# Altium PCB BQ25895_BMS_Module.PcbDoc
Units mm, origin at the board's own origin, x right, y up, seen from the top; angles counter-clockwise.
Board outline 50 x 50 mm, 2 copper layers (Top Layer, Bottom Layer), stack 1.671 mm thick; 53 components, 25 nets, 140 pads, 19 vias.
Unrouted connection lines stored in the file: 90.
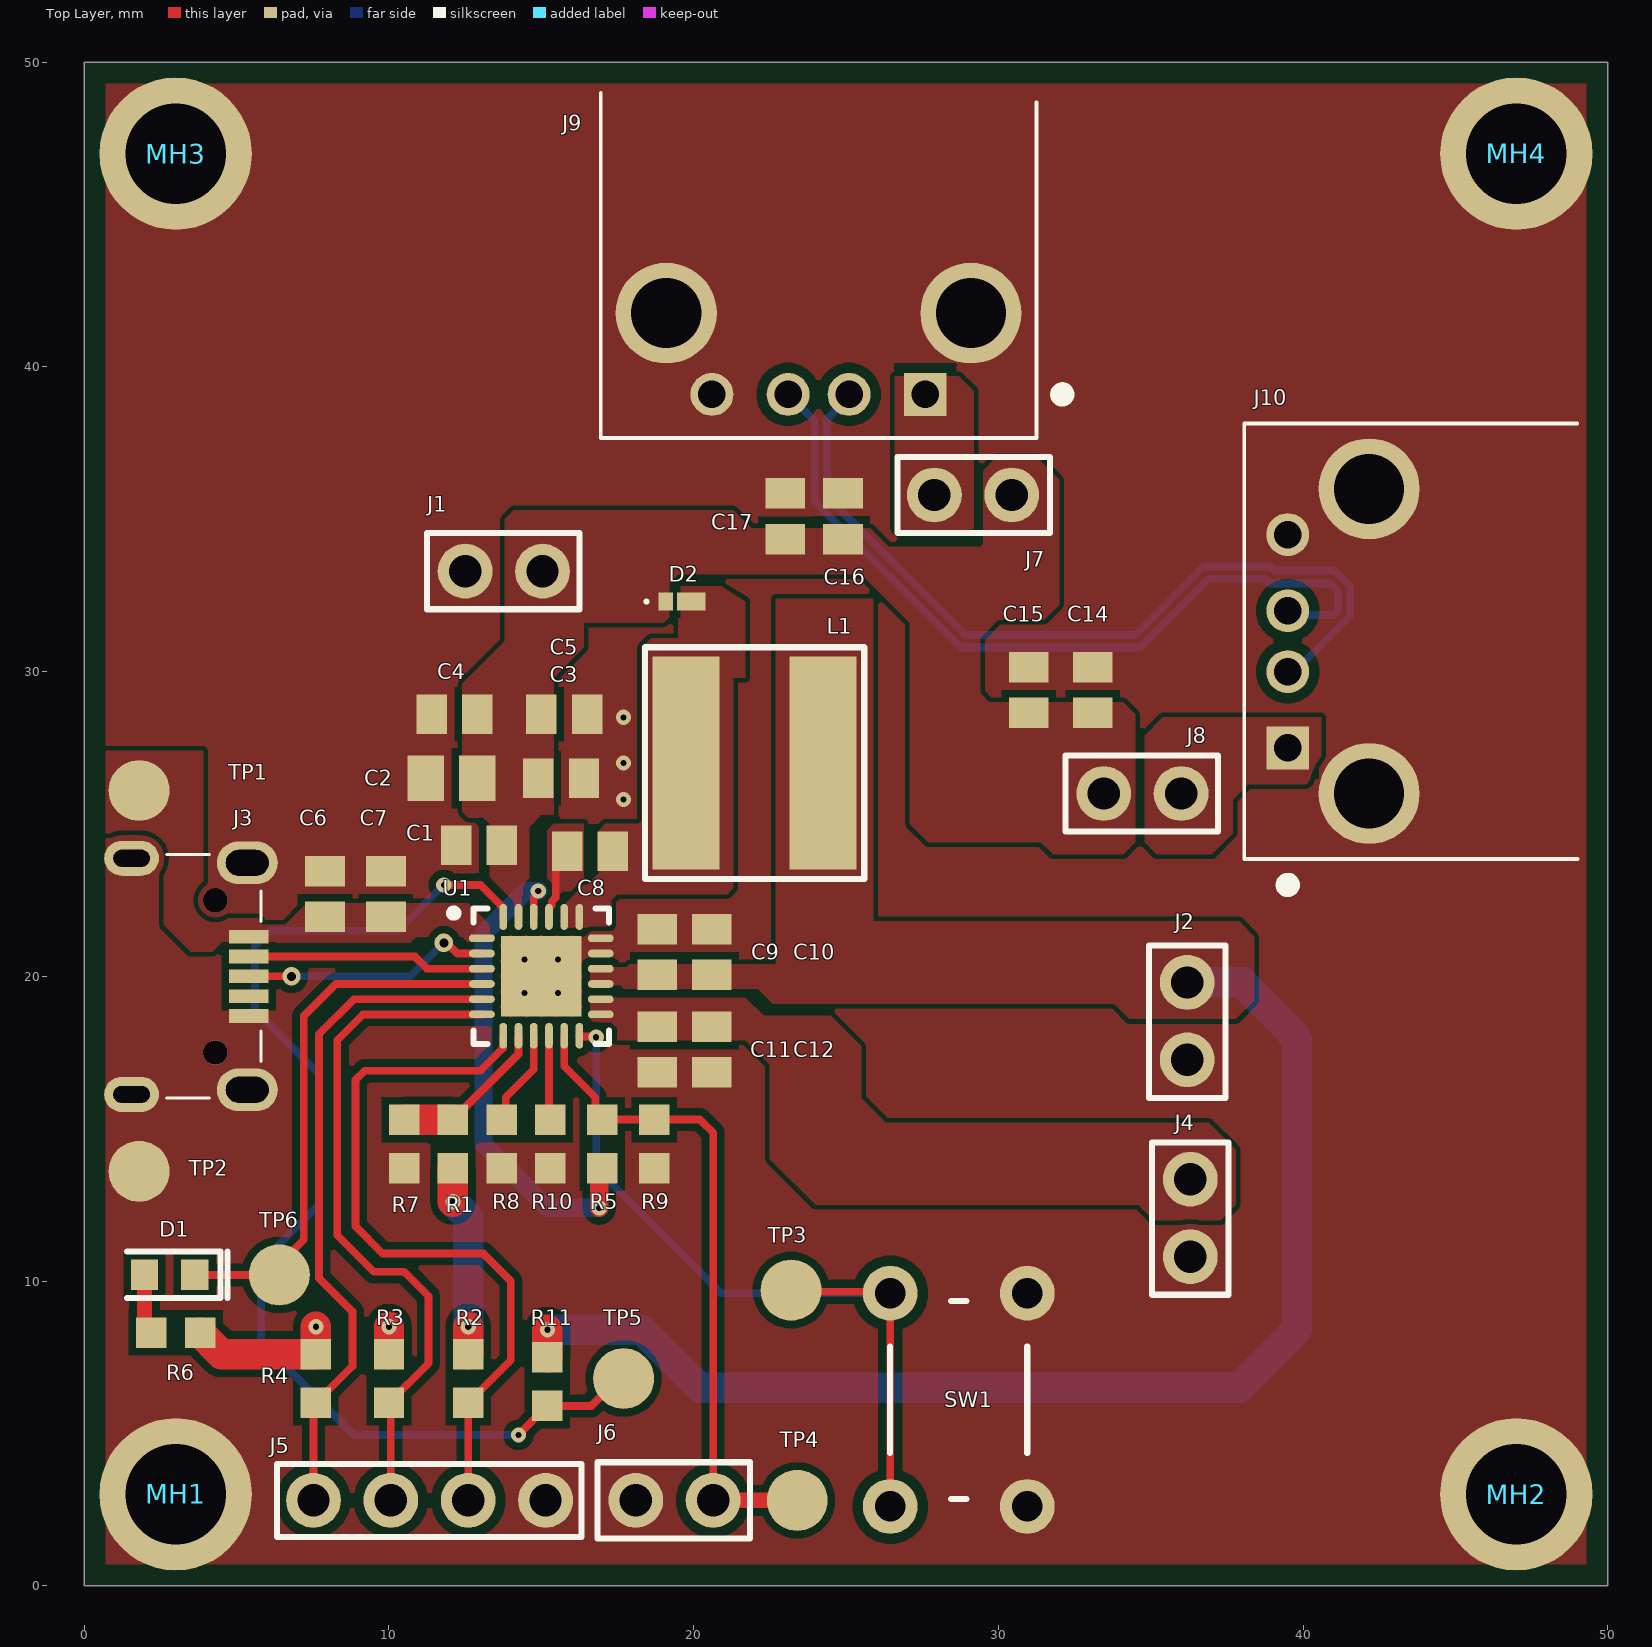
[diagram p0: Top Layer view]
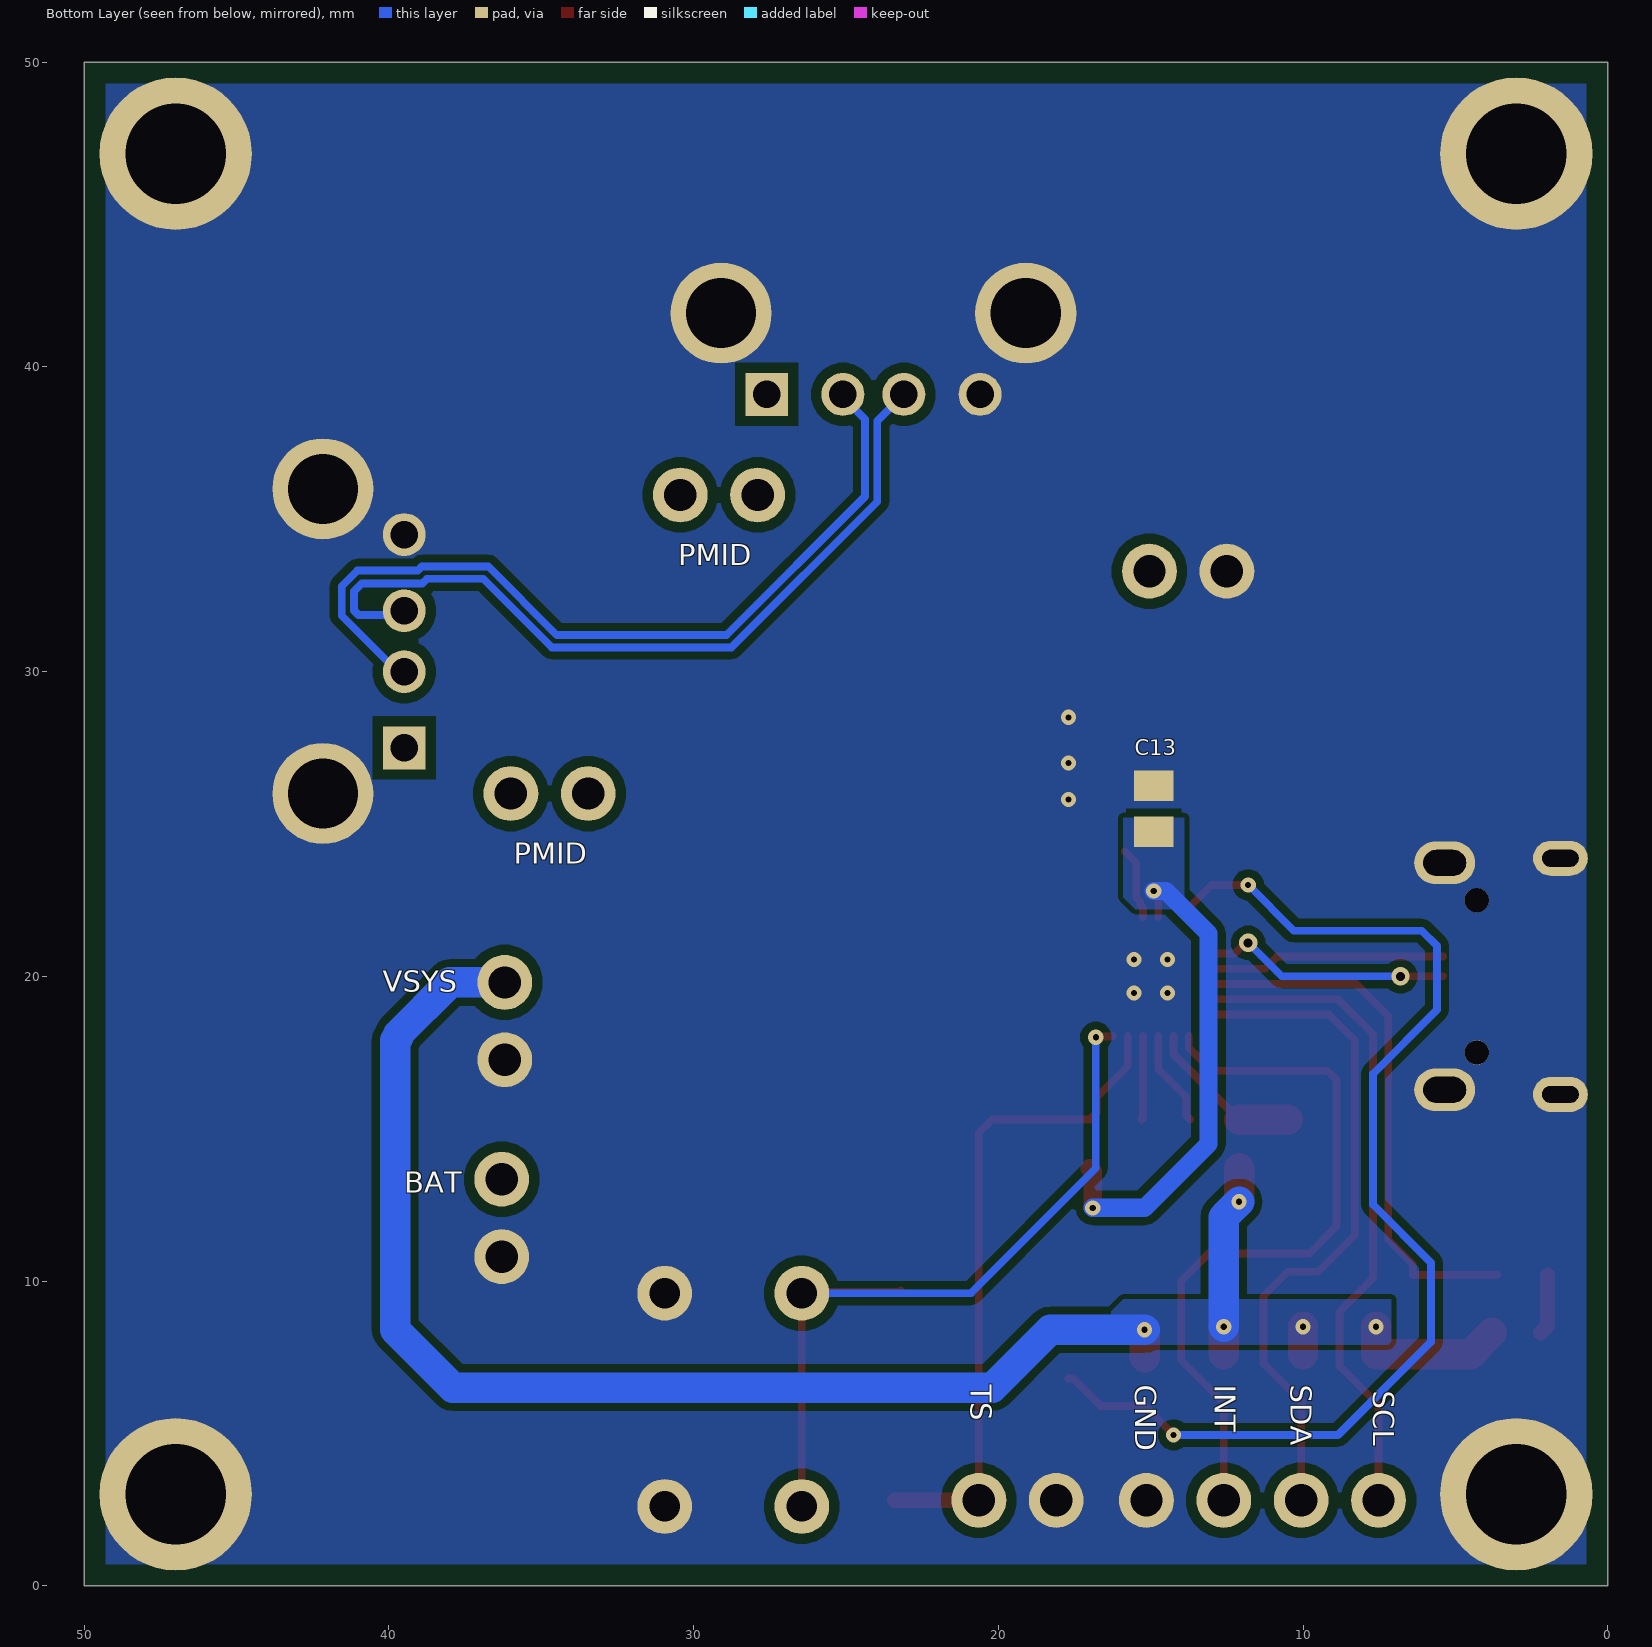
[diagram p1: Bottom Layer view, seen from below]
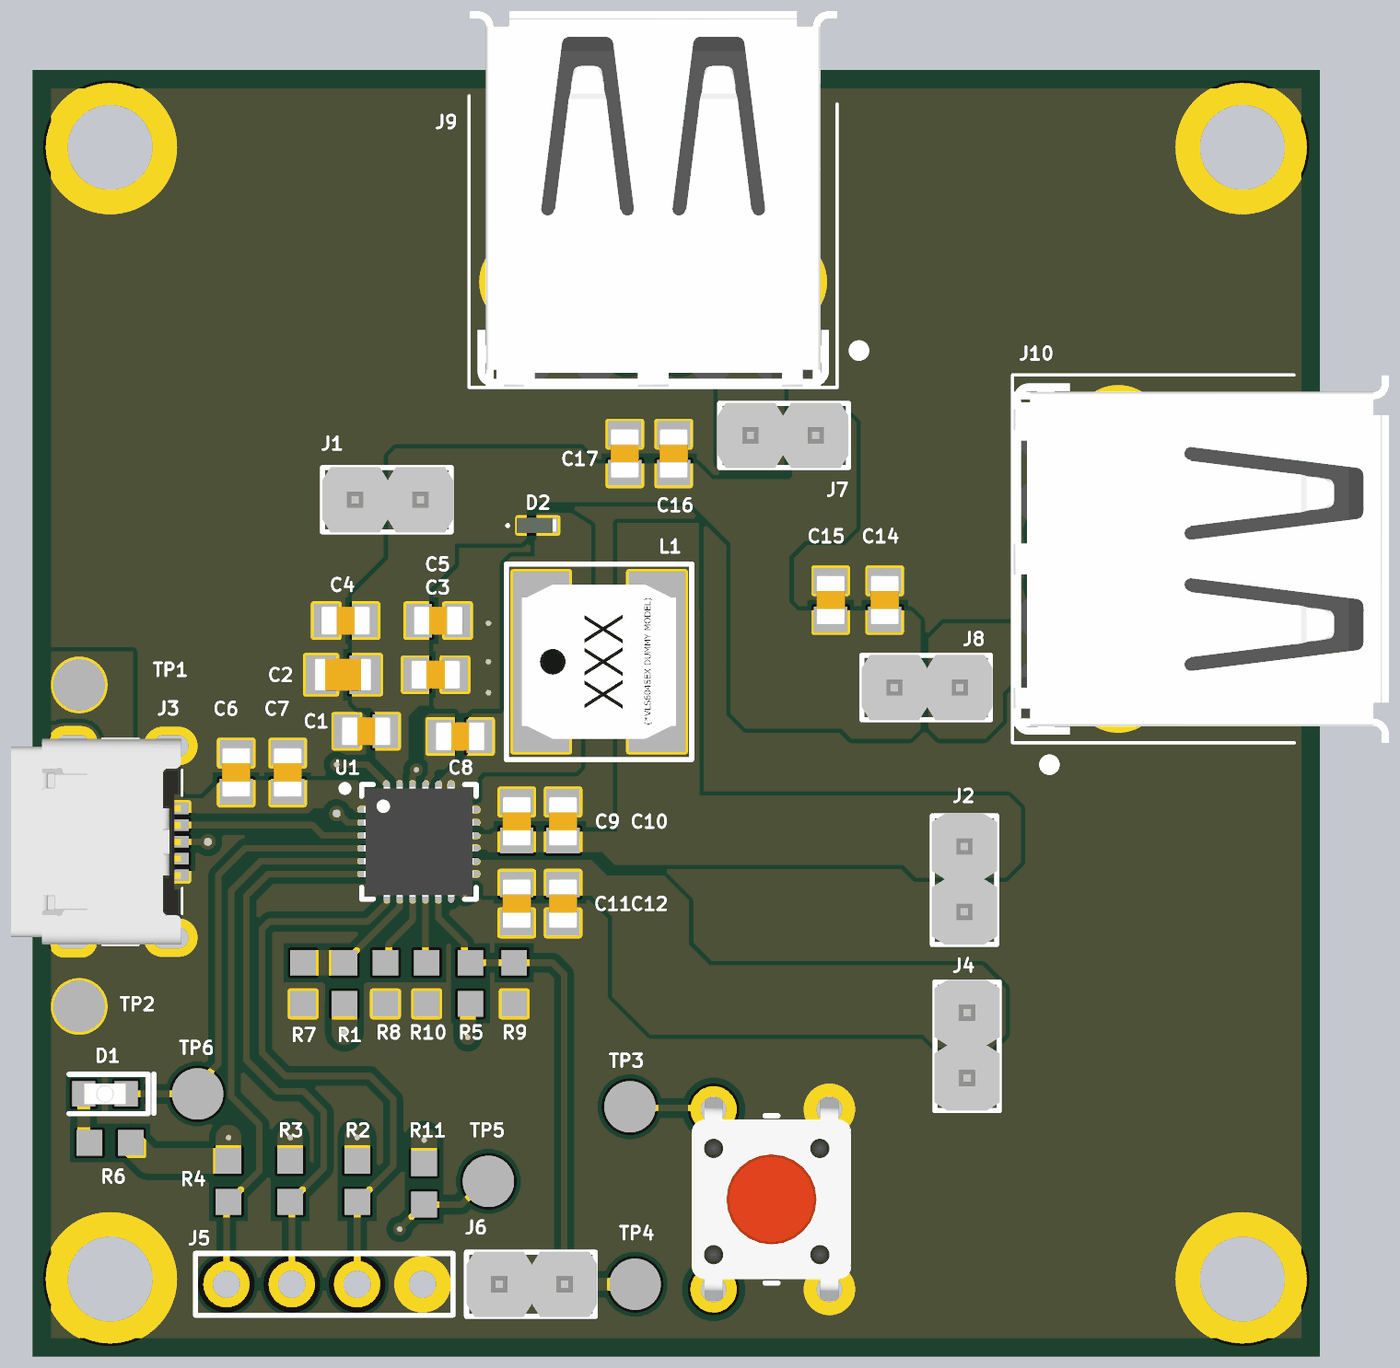
[diagram p2: 3D render of the assembled board from above, using the file's embedded part models]

## Layer stack, top to bottom
Top Solder: solder mask 0.0102, Solder Resist, Dk 3.5
Top Layer: signal copper 0.0356
Dielectric 1: dielectric 1.6, FR-4, Dk 4.8
Bottom Layer: signal copper 0.0356
Bottom Solder: solder mask 0.0102, Solder Resist, Dk 3.5

## Board outline
0,0 0,50 50,50 50,0 35,0

## Design rules (kind name [scope] priority, off if disabled: settings)
BoardOutlineClearance PAD_Clearance [InComponent('J1')] p1: gap=0.2 ignorepadtopadclearanceinfootprint=FALSE
BoardOutlineClearance "USB Connector" [InComponentClass('USBconnector')] p2: gap=0.2 ignorepadtopadclearanceinfootprint=FALSE
BoardOutlineClearance Mounting_Hole_Clearance [InComponentClass('Mounting Hole')] p3: gap=0.2 ignorepadtopadclearanceinfootprint=FALSE
BoardOutlineClearance Top_Overlay_Clearance [OnLayer('Top Overlay')] p4: gap=0.2 ignorepadtopadclearanceinfootprint=FALSE
BoardOutlineClearance [All] p5: gap=0.7 ignorepadtopadclearanceinfootprint=FALSE
Clearance Fid_C [InComponentClass('FIDUCIALS') vs InPolygon] p1: gap=0.5 ignorepadtopadclearanceinfootprint=TRUE
Clearance [All] p2: gap=0.254 ignorepadtopadclearanceinfootprint=TRUE except(0.102: Arc-Via Track-Via; 0.127: SMDPad-SMDPad; 0.15: Arc-Arc Arc-Track Arc-Text Track-Track Track-Text SMDPad-Text THPad-Text Via-Text Fill-Text Poly-Text Region-Text Text-Text Text-Hole; 0.152: Fill-Fill Fill-Poly Fill-Region Poly-Poly Poly-Region Region-Region; 0.16: Arc-SMDPad Track-SMDPad; 0.2: SMDPad-THPad; 0.279: Via-Via; 0.33: Arc-THPad Arc-Hole Track-THPad Track-Hole THPad-Fill THPad-Poly THPad-Region Fill-Hole Poly-Hole Region-Hole; 0.5: THPad-THPad THPad-Via THPad-Hole Via-Hole)
DiffPairsRouting ANAI_OUT [InDifferentialPair('GNSS_FE_ANAI')] p1: maxlimit=0.15 minlimit=0.15 mostfreqgap=0.15 toplayer_minwidth=0.194 toplayer_maxwidth=0.194 toplayer_prefwidth=0.194 bottomlayer_minwidth=0.194 bottomlayer_maxwidth=0.194 bottomlayer_prefwidth=0.194 maxuncoupledlength=12.7
HoleSize [All] p1: absolutevalues=TRUE maxlimit=6.3 minlimit=0.2 maxpercent=80.000 minpercent=20.000
HoleToHoleClearance Via_To_Via_Clearance [IsVia vs IsVia] p1: gap=0.254 allowstackedmicrovias=TRUE
HoleToHoleClearance [All] p2: gap=0.406 allowstackedmicrovias=TRUE
MatchedLengths "Mateched Lengths" [InNetClass('IQ_DATA')] p1: tolerance=1 checknetsindiffpair=FALSE checkdiffpairvsdiffpair=TRUE checkxsignals=TRUE checkothers=TRUE
MatchedLengths ANAI [InNetClass('ANAI_OUT')] p2: tolerance=0.5 checknetsindiffpair=FALSE checkdiffpairvsdiffpair=TRUE checkxsignals=TRUE checkothers=TRUE
MinimumAnnularRing [All] p1: minimumring=0.13
MinimumSolderMaskSliver MinimumSolderMaskSliver_U1 [InComponent('U1')] p1: minsoldermaskwidth=0.1
MinimumSolderMaskSliver [All] p2: minsoldermaskwidth=0.2
PlaneClearance [All] p1: clearance=0.127
PlaneConnect [All] p1: planeconnectstyle=Direct reliefexpansion=0.508 reliefentries=4 reliefconductorwidth=0.254 reliefairgap=0.254
PolygonConnect [All] p1: connectstyle=Direct reliefconductorwidth=0.254 reliefentries=4 polygonreliefangle="90 Angle" airgapwidth=0.254
RoutingVias [All] p1: holewidth=0.2 width=0.5 viastyle="Through Hole" minholewidth=0.2 minwidth=0.5 maxholewidth=0.3 maxwidth=0.6
SilkToSilkClearance [All] p1: silktosilkclearance=0.15
SilkToSolderMaskClearance [IsPad] p1: minsilkscreentomaskgap=0.15 clearancetoexposedcopper=TRUE
SolderMaskExpansion [All] p1: expansion=0.102 istentingtop=FALSE
UnConnectedPin [not InComponentClass('FIDUCIALS') and InComponent('D3') and InComponent('D2')] p1:
UnRoutedNet [All] p1: checkbadconnections=TRUE
Width "IQ DATA" [InNetClass('IQ_DATA')] p1: maxlimit=0.146 minlimit=0.146 preferedwidth=0.146
Width "RF LINE" [InNetClass('RF LINE')] p2: maxlimit=0.146 minlimit=0.146 preferedwidth=0.146
Width [All] p3: maxlimit=5 minlimit=0.01 preferedwidth=0.2
21 further rules are at their usual default settings.

## Classes and differential pairs
component class USBconnector: J3
component class "Mounting Hole": MH1 MH2 MH3 MH4
differential pair USB2: +USB2_P -USB2_N
differential pair USB: +USB_P -USB_N

## Components (designator, comment, footprint, x,y, rotation, side; value= is the part's Value field where it differs from the comment)
C1 "10uF(0603 in )" Capacitor_0603 12.95,24.3 r0 top
C2 "22uF(10V)" Capacitor_0805 12.05,26.5 r0 top
C3 "10uF(0603 in )" Capacitor_0603 15.65,26.5 r180 top
C4 "10uF(0603 in )" Capacitor_0603 12.15,28.6 r0 top
C5 "10uF(0603 in )" Capacitor_0603 15.75,28.6 r180 top
C6 "10uF(0603 in )" Capacitor_0603 7.9,22.7 r270 top
C7 "0.1uF(25V)" Capacitor_0603 9.9,22.7 r270 top
C8 "47nF(25V)" Capacitor_0603 16.6,24.1 r0 top
C9 "10uF(0603 in )" Capacitor_0603 18.8,20.8 r270 top
C10 "10uF(0603 in )" Capacitor_0603 20.6,20.8 r270 top
C11 "10uF(0603 in )" Capacitor_0603 18.8,17.6 r90 top
C12 "0.1uF(25V)" Capacitor_0603 20.6,17.6 r90 top
C13 "4.7uF(10V)" Capacitor_0603 14.9,25.5 r270 bottom
C14 "10uF(0603 in )" Capacitor_0603 33.1,29.4 r270 top
C15 "0.1uF(25V)" Capacitor_0603 31,29.4 r270 top
C16 "10uF(0603 in )" Capacitor_0603 24.9,35.1 r270 top
C17 "0.1uF(25V)" Capacitor_0603 23,35.1 r270 top
D1 "LED_BLUE" 0603_LED 2.8,10.2 r0 top
D2 "NSR10F20NXT5G" NSR10F20NXT5G 19.5,32.3 r0 top
J1 "PEC02SAAN" P2.541X2HDR 12.5,33.3 r0 top
J2 "PEC02SAAN" P2.541X2HDR 36.2,17.26 r90 top
J3 "MicroUSB" "Micro USB" 5.4,20 r270 top
J4 "PEC02SAAN" P2.541X2HDR 36.3,10.8 r90 top
J5 "1x4HDR" P2.541X4HDR 7.52,2.8 r0 top
J6 "PEC02SAAN" P2.541X2HDR 18.1,2.8 r0 top
J7 "PEC02SAAN" P2.541X2HDR 30.44,35.8 r180 top
J8 "PEC02SAAN" P2.541X2HDR 33.46,26 r0 top
J9 "UJ2-AH-4-TH" CUI_UJ2-AH-4-TH 27.6,39.1 r180 top
J10 "UJ2-AH-4-TH" CUI_UJ2-AH-4-TH 39.5,27.5 r90 top
L1 "1uH" VLS6045EX-1R0N 22,27 r0 top
MH1 "Mounting Hole" Mounting_Hole_3.3mm 3,3 r0 top
MH2 "Mounting Hole" Mounting_Hole_3.3mm 47,3 r0 top
MH3 "Mounting Hole" Mounting_Hole_3.3mm 3,47 r0 top
MH4 "Mounting Hole" Mounting_Hole_3.3mm 47,47 r0 top
R1 "10K" RESISTOR0603 12.1,14.5 r270 top
R2 "10K" RESISTOR0603 12.6,6.8 r90 top
R3 "10K" RESISTOR0603 10,6.8 r90 top
R4 "10K" RESISTOR0603 7.6,6.8 r90 top
R5 "5.23K(1%)" RESISTOR0603 17,14.5 r270 top
R6 "100R(0603 in )" RESISTOR0603 3,8.3 r0 top
R7 "0R(0603 in )" RESISTOR0603 10.5,14.5 r90 top
R8 "10K" RESISTOR0603 13.7,14.5 r90 top
R9 "30.1K(1%)" RESISTOR0603 18.7,14.5 r90 top
R10 "261R(1%)" RESISTOR0603 15.3,14.5 r90 top
R11 "10K" RESISTOR0603 15.2,6.7 r90 top
SW1 "SWITCH" "PushButton nf" 28.7,6.1 r90 top
TP1 "Test Pad" TestPoint 1.8,26.1 r0 top
TP2 "Test Pad" TestPoint 1.8,13.6 r0 top
TP3 "Test Pad" TestPoint 23.2,9.7 r0 top
TP4 "Test Pad" TestPoint 23.4,2.8 r0 top
TP5 "Test Pad" TestPoint 17.7,6.8 r0 top
TP6 "Test Pad" TestPoint 6.4,10.2 r0 top
U1 "BQ25895RTWR" 24-WQFN 15,20 r0 top

## Footprints (in the part's own frame and the unit in brackets; to place one, negate y for a bottom-side part, rotate by r counter-clockwise, add the part's x,y. Pads: shape width x height; smd on the part's side, far side on the other; paste and mask are expansions set on the pad)
24-WQFN [mm] "24 Pin WQFN Package"
  oval 0.85x0.25 smd mask+0.025: 1(-1.95,1.25) 2(-1.95,0.75) 3(-1.95,0.25) 4(-1.95,-0.25) 5(-1.95,-0.75) 6(-1.95,-1.25) 13(1.95,-1.25) 14(1.95,-0.75) 15(1.95,-0.25) 16(1.95,0.25) 17(1.95,0.75) 18(1.95,1.25)
  oval 0.25x0.85 smd mask+0.025: 7(-1.25,-1.95) 8(-0.75,-1.95) 9(-0.25,-1.95) 10(0.25,-1.95) 11(0.75,-1.95) 12(1.25,-1.95) 19(1.25,1.95) 20(0.75,1.95) 21(0.25,1.95) 22(-0.25,1.95) 23(-0.75,1.95) 24(-1.25,1.95)
  rect 2.65x2.65 smd mask+0.025: 25(0,0)
  silkscreen extent -3,-2.22 2.22,2.23, body extent -2.12,-2.12 2.12,2.12, height 0.8
0603_LED [mm] "SMD 0603 LED"
  rect 0.9x1 smd: 1(-0.825,0) 2(0.825,0)
  silkscreen extent -1.4,-0.76 1.9,0.77, body extent -0.8,-0.4 0.8,0.4, height 0.96
Capacitor_0603 [mm] "Capacitor with 0603 (1608 Metric) Footprint"
  rect 1x1.3 smd: 1(-0.75,0) 2(0.75,0)
  body extent -0.95,-0.55 0.95,0.55, height 0.8
Capacitor_0805 [mm] "Capacior 0805"
  rect 1.2x1.5 smd: 1(-0.85,0) 2(0.85,0)
  body extent -1.1,-0.63 1.1,0.63, height 0.8
CUI_UJ2-AH-4-TH [mm]
  rect 1.408x1.408 hole 0.9: 1(0,0)
  round 1.408 hole 0.9: 2(2.5,0) 3(4.5,0) 4(7,0)
  round 3.316 hole 2.3: SH1(-1.5,-2.67) SH2(8.5,-2.67)
  silkscreen extent -4.7,-9.9 10.65,1.43, body extent -3.65,-13.2 10.65,1.45, height 7.43
"Micro USB" [mm]
  rect 0.45x1.3 smd: 1(-1.3,0) 2(-0.65,0) 3(0,0) 4(0.65,0) 5(1.3,0)
  oval 1.4x2 hole 0.85 slot 1.4 at 90 deg mask+0.05: 6(3.725,-0.05) 7(-3.725,-0.05)
  oval 1.15x1.8 hole 0.55 slot 1.2 at 90 deg mask+0.05: 8(-3.875,-3.85) 9(3.875,-3.85)
  round 0.8 hole 0.8 mask+0.05: 10(-2.5,-1.1) 11(2.5,-1.1)
  silkscreen extent -4,-2.7 4,0.4, body extent -4,-6.25 4,0.35, height 2.77
Mounting_Hole_3.3mm [mm] "3.3mm Mounting Holes"
  round 5 hole 3.3: 1(0,0)
NSR10F20NXT5G [mm]
  rect 0.47x0.6 smd: 1(-0.42,0)
  rect 0.95x0.6 smd: 2(0.42,0)
  silkscreen extent -1.1,-0.05 -1,0.05, body extent -0.7,-0.3 0.83,0.3, height 0.41
P2.541X2HDR [mm]
  round 1.8 hole 1.06: 1(0,0) 2(2.54,0)
  silkscreen extent -1.25,-1.25 3.75,1.25, body extent -1.25,-1.27 3.83,1.27, height 8.84
P2.541X4HDR [mm]
  round 1.8 hole 1.06 mask+0.2: 1(0,0) 2(2.54,0) 3(5.08,0) 4(7.62,0)
  silkscreen extent -1.2,-1.2 8.8,1.2
"PushButton nf" [mm]
  round 1.8 hole 1: 1(-3.5,2.25) 2(-3.5,-2.25) 3(3.5,2.25) 4(3.5,-2.25)
  silkscreen extent -3.25,-2.25 3.25,2.25, body extent -3.95,-3.1 3.95,3.1, height 7
RESISTOR0603 [mm]
  rect 1x1 smd: 1(-0.8,0) 2(0.8,0)
  body extent -0.9,-0.45 0.9,0.45, height 0.45
TestPoint [mm] "Test Point"
  round 2 smd: 1(0,0)
VLS6045EX-1R0N [mm]
  rect 2.2x7 smd: 1(-2.25,0) 2(2.25,0)
  silkscreen extent -3.6,-3.8 3.6,3.8, body extent -3,-3 3,3, height 4.51

## Part data
C1 C3 C4 C5 C6 C9 C10 C11 C14 C16: library part GRM188R61E106KA73D, "10µF ±10% 25V Ceramic Capacitor X5R 0603 (1608 Metric)", Manufacturer="Murata Electronics", MaxTemp=85°C, MinTemp=-55°C, SupplierPartNumber=490-18214-1-ND, ComponentLink1Description=SupplierURL, ComponentLink1URL=https://www.digikey.com/en/products/detail/murata-electronics/GRM188R61E106KA73D/9867922, ManufacturerPartNumber=GRM188R61E106KA73D, PartStatus=Active, Price=0.32, Supplier=Digikey
C2: library part CL21A226KPCLRNC, "22 µF ±10% 10V Ceramic Capacitor X5R 0805 (2012 Metric)", Manufacturer="Samsung Electro-Mechanics", MaxTemp=85°C, MinTemp=-55°C, SupplierPartNumber=1276-6786-1-ND, ComponentLink1Description=SupplierURL, ComponentLink1URL=https://www.digikey.in/en/products/detail/samsung-electro-mechanics/CL21A226KPCLRNC/5961270, ManufacturerPartNumber=CL21A226KPCLRNC, PartStatus=Active, Price=0.39, Supplier=Digikey
C7 C12 C15 C17: library part C0603C104J3RAC7411, "±5% 25V Ceramic Capacitor X7R 0603 (1608 Metric)", Manufacturer=KEMET, MaxTemp=125°C, MinTemp=-55°C, SupplierPartNumber=399-C0603C104J3RAC7411CT-ND, ComponentLink1Description=SupplierURL, ComponentLink1URL=https://www.digikey.com/en/products/detail/kemet/C0603C104J3RAC7411/12701256, ManufacturerPartNumber=C0603C104J3RAC7411, PartStatus=Active, Price=0.43, Supplier=Digikey
C8: library part C0603C473J3RACAUTO, "0.047 µF ±5% 25V Ceramic Capacitor X7R 0603 (1608 Metric)", Manufacturer=KEMET, MaxTemp=125C, MinTemp=-55C, SupplierPartNumber=399-6897-1-ND, ComponentLink1Description=SupplierURL, ComponentLink1URL=https://www.digikey.in/en/products/detail/kemet/C0603C473J3RACAUTO/3314892, ManufacturerPartNumber=C0603C473J3RACAUTO, PartStatus=Active, Price=0.18, Supplier=Digikey
C13: library part 0603ZD475KAT2A, "4.7 µF ±10% 10V Ceramic Capacitor X5R 0603 (1608 Metric)", Manufacturer="KYOCERA AVX", MaxTemp=85C, MinTemp=-55C, SupplierPartNumber=478-7943-1-ND, ComponentLink1Description=SupplierURL, ComponentLink1URL=https://www.digikey.in/en/products/detail/kyocera-avx/0603ZD475KAT2A/3080849, ManufacturerPartNumber=0603ZD475KAT2A, PartStatus=Active, Price=0.81, Supplier=Digikey
D1: library part BHC-ZL1M2RY/3T, "Blue 465~475nm 0603 Light Emitting Diodes (LED) ROHS", Manufacturer="Everlight Elec", MaxTemp=85C, MinTemp=-40C, SupplierPartNumber=C131231, ComponentLink1Description=SupplierURL, ComponentLink1URL=https://lcsc.com/product-detail/Light-Emitting-Diodes-LED_Everlight-Elec-19-213-BHC-ZL1M2RY-3T_C131231.html, ManufacturerPartNumber=BHC-ZL1M2RY/3T, Price=0.57, Supplier=LCSC
D2: "Diode Schottky 20 V 1A (DC) Surface Mount 2-DSN (1.4x0.6)", Manufacturer="ON Semiconductor", MaxTemp=+150°C, SupplierPartNumber=NSR10F20NXT5GOSCT-ND, ComponentLink1Description=SupplierURL, ComponentLink1URL=https://www.digikey.com/en/products/detail/on-semiconductor/NSR10F20NXT5G/2401415, ManufacturerPartNumber=NSR10F20NXT5G, PartStatus=Active, Price=0.51, Supplier=Digikey
J1 J2 J4 J6 J7 J8: "Connector Header Through Hole 2 position 0.100\" (2.54mm)", Max Temp=125°C, Min Temp=-65°C, Supplier Part Number=S1012E-02-ND, ComponentLink1Description="Supplier Link", ComponentLink1URL=https://www.digikey.com/en/products/detail/sullins-connector-solutions/PEC02SAAN/859155, Manyfacturer Part Number=PEC02SAAN, Part Status=Active, Price=0.18
J3: library part 629105150521, "USB - micro B USB 2.0 Receptacle Connector 5 Position Surface Mount, Right Angle; Through Hole", Manufacturer="Würth Elektronik", MaxTemp=85°C, MinTemp=-40°C, SupplierPartNumber=732-5960-1-ND, ClassName=USBconnector, ComponentLink1Description=SupplierURL, ComponentLink1URL=https://www.digikey.com/en/products/detail/würth-elektronik/629105150521/5047751, ManufacturerPartNumber=629105150521, PartStatus=Active, Price=2.07, Supplier=Digikey
J5: library part PEC04SAAN, "Connector Header Through Hole 4 position 0.100\" (2.54mm)", MaxTemp=125°C, MinTemp=-65°C, SupplierPartNumber=S1012E-04-ND, ComponentLink1Description=SupplierURL, ComponentLink1URL=https://www.digikey.com/en/products/detail/sullins-connector-solutions/PEC04SAAN/859157, Maanufacturer="Sullins Connector Solutions", ManufacturerPartNumber=PEC04SAAN, PartStatus=Active, Price=0.27, Supplier=Digikey
J9 J10: "USB-A (USB TYPE-A) USB 2.0 Receptacle Connector 4 Position Through Hole, Right Angle", Manufacturer="CUI Devices", MaxTemp=85C, MinTemp=-20C, SupplierPartNumber=102-3994-ND, ComponentLink1Description=SupplierURL, ComponentLink1URL=https://www.digikey.in/en/products/detail/cui-devices/UJ2-AH-4-TH/6187909, ManufacturerPartNumber=UJ2-AH-4-TH, PartStatus=Active, Price=0.97, Supplier=Digikey
L1: library part VLS6045EX-1R0N, "FIXED IND 1UH 6A 16 MOHM SMD", Manufacturer="TDK Corporation", MaxTemp=105C, MinTemp=-40C, SupplierPartNumber=445-173043-1-ND, ComponentLink1Description=SupplierURL, ComponentLink1URL=https://www.digikey.in/en/products/detail/tdk-corporation/VLS6045EX-1R0N/5286692, ManufacturerPartNumber=VLS6045EX-1R0N, PartStatus=Active, Price=0.51, Supplier=Digikey
MH1 MH2 MH3 MH4: library part 3MM_MOUNTING_HOLE, "3.3mm Mounting Hole", ClassName="Mounting Hole"
R1 R2 R3 R4 R8 R11: library part RMCF0603JT10K0, "10 kOhms ±5% 0.1W, 1/10W Chip Resistor 0603 (1608 Metric) Automotive AEC-Q200 Thick Film", Manufacturer="Stackpole Electronics Inc", MaxTemp=155°C, MinTemp=-55°C, SupplierPartNumber=RMCF0603JT10K0CT-ND, ComponentLink1Description=SupplierURL, ComponentLink1URL=https://www.digikey.com/en/products/detail/stackpole-electronics-inc/RMCF0603JT10K0/1758104, ManufacturerPartNumber=RMCF0603JT10K0, PartStatus=Active, Price=0.10, Supplier=Digikey
R5: library part RMCF0603FT5K23, "5.23 kOhms ±1% 0.1W, 1/10W Chip Resistor 0603 (1608 Metric) Automotive AEC-Q200 Thick Film", Manufacturer="Stackpole Electronics Inc", MaxTemp=155C, MinTemp=-55C, SupplierPartNumber=RMCF0603FT5K23CT-ND, ComponentLink1Description=SupplierURL, ComponentLink1URL=https://www.digikey.in/en/products/detail/stackpole-electronics-inc/RMCF0603FT5K23/1760913, ManufacturerPartNumber=RMCF0603FT5K23, PartStatus=Active, Price=0.10, Supplier=Digikey
R6: library part CRCW0603100RJNEAC, "100 Ohms ±5% 0.1W, 1/10W Chip Resistor 0603 (1608 Metric)  Thick Film", Max Temp=155°C, Min Temp=-55°C, Supplier Part Number=541-4059-1-ND, ComponentLink1Description="Supplier Link", ComponentLink1URL=https://www.digikey.com/en/products/detail/vishay-dale/CRCW0603100RJNEAC/7928481, Manufacturer Part Number=CRCW0603100RJNEAC, Part Status=Active, Price=0.10
R7: library part SR1-0603-000, "0 Ohms ±5% 0.063W, 1/16W Chip Resistor 0603 (1608 Metric)  Thick Film", Max Temp=155°C, Min Temp=-55°C, Supplier Part Number=2368-SR1-0603-000-ND, ComponentLink1Description="Supplier Link", ComponentLink1URL=https://www.digikey.com/en/products/detail/nte-electronics-inc/SR1-0603-000/11644791, Manufacturer Part Number=SR1-0603-000, Part Status=Active, Price=0.02000
R9: library part RMCF0603FG30K1, "30.1 kOhms ±1% 0.1W, 1/10W Chip Resistor 0603 (1608 Metric) Automotive AEC-Q200 Thick Film", Manufacturer="Stackpole Electronics Inc", MaxTemp=155°C, MinTemp=-55°C, SupplierPartNumber=RMCF0603FG30K1CT-ND, ComponentLink1Description=SupplierURL, ComponentLink1URL=https://www.digikey.in/en/products/detail/stackpole-electronics-inc/RMCF0603FG30K1/1713912, ManufacturerPartNumber=RMCF0603FG30K1, PartStatus=Active, Price=0.10, Supplier=DIgikey
R10: library part ERJ-PA3F2610V, "Thick Film Resistors 0603 261ohm 1% Anti-Surge AEC-Q200", Manufacturer=Panasonic, MaxTemp="+ 155 C", MinTemp="- 55 C", SupplierPartNumber=667-ERJ-PA3F2610V, ComponentLink1Description=SupplierURL, ComponentLink1URL=https://www.mouser.in/ProductDetail/Panasonic/ERJ-PA3F2610V?qs=BzJM0faLVqWOtl0KpXWkew%3D%3D, ManufacturerPartNumber=ERJ-PA3F2610V, PartStatus=Active, Price=11.20(INR), Supplier=Digikey
SW1: library part TL1105DF160Q, "Tactile Switch SPST-NO Top Actuated Surface Mount", Manufacturer=E-Switch, MaxTemp=70°C, MinTemp=-20°C, SupplierPartNumber=EG1865-ND, ComponentLink1Description=SupplierURL, ComponentLink1URL=https://www.digikey.com/en/products/detail/e-switch/TL1105DF160Q/271562, ManufacturerPartNumber=TL1105DF160Q, PartStatus=Active, Price=0.17, Supplier=Digikey
TP1 TP2 TP3 TP4 TP5 TP6: library part TestPoint, "2mm Diameter test point", ComponentLink1Description="Supplier Link"
U1: "Charger IC Lithium Ion/Polymer 24-WQFN (4x4)", Manufacturer="Texas Instruments", MaxTemp=85°C, MinTemp=-40°C, SupplierPartNumber=296-44345-1-ND, ComponentLink1Description=SupplierURL, ComponentLink1URL=https://www.digikey.com/en/products/detail/texas-instruments/BQ25895RTWR/5214018, ManufacturerPartNumber=BQ25895RTWR, PartStatus=Active, Price=3.46, Supplier=Digikey

## Via types
v1: diameter 0.5, hole 0.2, Top Layer to Bottom Layer, tented both sides, 13 vias
v2: diameter 0.5, hole 0.2, Top Layer to Bottom Layer, 4 vias
v3: diameter 0.6, hole 0.3, Top Layer to Bottom Layer, tented both sides, 2 vias

## Nets (pads, with @x,y where several pads share a name; then routed paths per layer and width w, separated by ;. In a path a pad name is that pad's centre, name@x,y a point inside that pad or via, vN(x,y) a via of type N, cw(c..) or ccw(c..) an arc to the next point about the centre after c; other vN are vias at no path point)
BQ25895_BAT: C11.2 C12.2 J4.2 U1.13 U1.14
BQ25895_C\E\: R8.2 U1.9 | length 3.2
  Top Layer w0.254: R8.2 13.832,15.432 13.832,16.032 14.75,16.95 U1.9
BQ25895_DSEL: R11.1 TP5.1 U1.24 | length 38.2
  Top Layer w0.254: v1(11.8,23) 13,23 13.75,22.25 U1.24 ; v1(14.247,4.947) R11.1 16.647,5.9 17.547,6.8 TP5.1
  Bottom Layer w0.254: v1(11.8,23) 10.3,21.5 6.1,21.5 5.6,21 5.6,18.9 7.7,16.8 7.7,12.5 5.8,10.6 5.8,8 8.853,4.947 v1(14.247,4.947)
BQ25895_ILIM: R10.2 U1.10 | length 2.8
  Top Layer w0.254: U1.10 15.25,15.35 R10.2
BQ25895_INT: J5.3 R2.1 U1.7 | length 24.1
  Top Layer w0.254: J5.3 R2.1 14,7.4 14,10 13.1,10.9 9.8,10.9 8.9,11.8 8.9,16.6 9.2,16.9 13,16.9 13.75,17.65 U1.7
BQ25895_OTG: R1.1 R7.2 U1.8 | length 5.2
  Top Layer w0.254: R1.1 14.25,17.45 U1.8
  Top Layer w1: R7.2 R1.1
BQ25895_SCL: J5.1 R4.1 U1.5 | length 22.1
  Top Layer w0.254: J5.1 7.52,5.92 R4.1 8.8,7.2 8.8,9 7.7,10.1 7.7,18.1 8.85,19.25 U1.5
BQ25895_SDA: J5.2 R3.1 U1.6 | length 22.6
  Top Layer w0.254: J5.2 10.06,5.94 R3.1 11.3,7.3 11.3,9.5 10.5,10.3 9.5,10.3 8.3,11.5 8.3,17.9 9.15,18.75 U1.6
BQ25895_STAT: D1.2 TP6.1 U1.4 | length 17.9
  Top Layer w0.254: D1.2 TP6.1 6.4,10.553 7.2,11.353 7.2,18.7 8.25,19.75 U1.4
BQ25895_TS: J6.2 R5.1 R9.2 TP4.1 U1.11 | length 21.9
  Top Layer w0.254: U1.11 15.75,17.05 16.768,16.032 16.768,15.532 R5.1 R9.2 20.2,15.3 20.64,14.86 J6.2
  Top Layer w0.5: J6.2 TP4.1
BQ_PMID: C1.2 C2.2 C3.2 C4.2 C5.2 C14.2 C15.2 C16.2 C17.2 D2.1 J1.2 J7.1 J8.1 U1.23
GND: C1.1 C2.1 C3.1 C4.1 C5.1 C6.1 C7.1 C9.1 C10.1 C11.1 C12.1 C13.1 C14.1 C15.1 C16.1 C17.1 J1.1 J2.1 J3.5 J3.6 J3.7 J3.8 J3.9 J3.10 J3.11 J4.1 J5.4 J6.1 J9.4 J9.SH1 J9.SH2 J10.4 J10.SH1 J10.SH2 MH1.1 MH2.1 MH3.1 MH4.1 R7.1 R8.1 R9.1 R10.1 SW1.2 SW1.4 TP2.1 U1.17 U1.18 U1.25
  other v1: 17.7,25.8 17.7,27 17.7,28.5
  other v2: 14.45,19.45 15.55,19.45 14.45,20.55 15.55,20.55
NetC8_1: C8.1 U1.21 | length 2.4
  Top Layer w0.254: U1.21 15.25,22.246 15.338,22.334 15.338,22.45 15.477,22.589 15.477,23.727 C8.1
NetC8_2: C8.2 D2.2 L1.1 U1.19 U1.20
NetD1_1: D1.1 R6.1 | length 2
  Top Layer w0.5: D1.1 1.975,8.525 R6.1
NetJ7_2: J7.2 J9.1
NetJ8_2: J8.2 J10.1
NetSW1_1: SW1.1 SW1.3 TP3.1 U1.12 | length 26.5
  Top Layer w0.254: U1.12 16.25,18.027 16.252,18.025 16.775,18.025 v1(16.8,18) ; TP3.1 23.25,9.65 26.4,9.65 SW1.3 SW1.1
  Bottom Layer w0.254: v1(16.8,18) 16.8,13.7 20.9,9.6 SW1.3
REGN: C13.2 R5.2 U1.22 | length 16.2
  Top Layer w0.254: U1.22 14.752,21.952 14.752,22.585 14.9,22.733 v1(14.9,22.8)
  Top Layer w0.6: v1(16.9,12.4) 16.9,13.6 R5.2
  Bottom Layer w0.6: v1(14.9,22.8) 14.5,22.8 13.1,21.4 13.1,14.5 15.2,12.4 v1(16.9,12.4)
USB2_N: J9.2 J10.2 | length 27.7
  Bottom Layer w0.254: J9.2 25.1,39.012 24.377,38.289 24.377,35.749 28.926,31.2 34.488,31.2 36.742,33.454 38.917,33.454 39.055,33.317 41.042,33.317 41.554,32.805 41.554,31.841 39.713,30 J10.2
USB2_P: J9.3 J10.3 | length 26.5
  Bottom Layer w0.254: J9.3 23.973,38.227 23.973,35.581 28.758,30.796 34.655,30.796 36.909,33.05 38.75,33.05 38.906,32.894 40.894,32.894 41.15,32.638 41.15,32.008 41.001,31.859 39.641,31.859 J10.3
USB_N: J3.2 U1.3 | length 7.8
  Top Layer w0.254: J3.2 10.85,20.65 11.25,20.25 U1.3
USB_P: J3.3 U1.2 | length 8.3
  Top Layer w0.254: J3.3 v3(6.8,20) ; v3(11.8,21.1) 11.894,21.1 12.244,20.75 U1.2
  Bottom Layer w0.254: v3(6.8,20) 10.7,20 v3(11.8,21.1)
VBUS: C6.2 C7.2 J3.1 TP1.1 U1.1
VSYS: C9.2 C10.2 J2.2 L1.2 R1.2 R2.2 R3.2 R4.2 R6.2 R11.2 U1.15 U1.16 | length 53.2
  Top Layer w1: R6.2 4.5,7.6 R4.2 v1(7.6,8.5) ; R3.2 v1(10,8.5) ; v1(12.1,12.6) R1.2 ; R2.2 v1(12.6,8.5) ; R11.2 v1(15.2,8.4)
  Bottom Layer w1: v1(12.1,12.6) 12.6,12.1 v1(12.6,8.5) ; v1(15.2,8.4) 18.3,8.4 20.2,6.5 37.9,6.5 39.8,8.4 39.8,17.9 39.7,18 39.7,18.1 38,19.8 J2.2
pads on no net: J3.4

## Polygon pours and split planes (outlines as drawn)
GND on Top Layer "GND_L01_P018" (solid, pour order 18): 0.1,0.1 0.1,49.9 49.9,49.9 49.9,0.1
NetJ7_2 on Top Layer "NETJ7_2_L01_P014" (solid, pour order 14): 26.6,39.7 28.7,39.7 29.2,39.2 29.2,36.5 29.2,34.7 29,34.5 26.8,34.5 26.6,34.7 26.6,35.9
NetC8_1 on Top Layer "NETC8_1_L01_P008" (solid, pour order 8): 15.1,21.7 15.1,22.5 15.2,22.6 15.2,23.2 15.2,24.8 15.4,25 16.4,25 16.4,23.2 16,22.8 15.7,22.8 15.5,22.6 15.5,21.7
NetJ8_2 on Top Layer "NETJ8_2_L01_P013" (solid, pour order 13): 40.6,28.5 35.4,28.5 34.8,27.9 34.8,24.4 35.2,24 37,24 37.7,24.7 37.7,25.8 38.2,26.3 40.1,26.3 40.6,26.8
BQ25895_BAT on Top Layer "BQ25895_BAT_L01_P012" (solid, pour order 12): 16.6,19.3 16.6,18.6 16.7,18.5 17.3,18.5 17.5,18.3 17.5,17.9 21.7,17.9 22.5,17.1 22.5,14 24,12.5 34.6,12.5 35.1,12 37.3,12 37.8,12.5 37.8,14.3 36.9,15.2 26.3,15.2 25.5,16 25.5,17.7 24.5,18.7 22.3,18.7 21.7,19.3
VSYS on Top Layer "VSYS_L01_P011" (solid, pour order 11): 16.6,20.3 16.6,19.7 17.6,19.7 17.7,19.6 22.1,19.6 22.6,19.1 33.8,19.1 34.3,18.6 37.8,18.6 38.4,19.2 38.4,21.3 37.9,21.8 25.9,21.8 25.892,32.4 22.7,32.4 22.7,20.4 17.9,20.4 17.8,20.3 17.7,20.3
BQ_PMID on Top Layer "BQ_PMID_L01_P010" (solid, pour order 10): 19.5,33.2 19.2,32.9 19.2,31.8 19,31.6 14.2,31.6 13.8,32 13.8,35 14.1,35.3 21.3,35.3 21.9,34.7 25.8,34.7 26.4,34.1 29.4,34.1 29.5,34.2 29.5,36.6 29.9,37 31.3,37 32,36.3 32,32.2 31.5,31.7 30,31.7 29.4,31.1 29.4,29.3 29.7,29 34.1,29 34.5,28.6 34.5,24.4 34.1,24 31.8,24 31.4,24.4 27.7,24.4 27.1,25 27.1,31.6 25.5,33.2
NetC8_2 on Top Layer "NETC8_2_L01_P009" (solid, pour order 9): 20.9,32.8 19.5,32.8 19.5,30.3 20,29.8 21.7,29.8 21.7,32.3
NetC8_2 on Top Layer "NETC8_2_L01_P007" (solid, pour order 7): 15.7,21.6 15.7,22.3 16.4,23 16.5,23 16.9,23.4 16.9,24.8 17.1,25 18.2,25 18.3,25.1 18.3,30.8 18.6,31.1 21,31.1 21.3,30.8 21.3,22.9 21.1,22.7 17.5,22.7 17.3,22.5 17.3,21.6
BQ_PMID on Top Layer "BQ_PMID_L01_P002" (solid, pour order 2): 14.1,21.8 14.1,22.4 13.3,23.2 13.3,25 13.1,25.2 12.6,25.2 12.4,25.4 12.4,29.6 13.4,30.6 13.8,31 13.8,34.3 14.1,34.6 15.8,34.6 16.4,34 16.4,30.8 15.4,29.8 15.4,25.3 15,25.3 14.6,24.9 14.6,23.1 14.4,22.9 14.4,21.8
VBUS on Top Layer "VBUS_L01_P001" (solid, pour order 1): 3.9,27.4 3.9,23.1 3.7,22.9 3.7,22.1 3.9,21.9 5.7,21.9 5.8,21.8 5.8,21.2 5.7,21.1 4.5,21.1 4.2,20.8 3.5,20.8 2.6,21.7 2.6,24.4 2.3,24.7 0.5,24.7 0.5,27.4
VBUS on Top Layer "VBUS_L01_P000" (solid, pour order 0): 4.6,21.7 4.6,21.1 10.7,21.1 10.9,21.3 12.4,21.3 12.6,21.1 13.3,21.1 13.3,21.7 12.6,22.4 7.3,22.4 6.6,21.7
GND on Bottom Layer "GND_L02_P016" (solid, pour order 16): 0.1,0.1 0.1,49.9 49.9,49.9 49.9,0.1
VSYS on Bottom Layer "VSYS_L02_P015" (solid, pour order 15): 7.1,9.4 15.9,9.4 16.3,9 16.3,8.2 16,7.9 7.2,7.9 7.1,8
REGN on Bottom Layer "REGN_L02_P006" (solid, pour order 6): 13.9,25.2 15.9,25.2 15.9,22.6 15.5,22.2 14.3,22.2 13.9,22.6

## Silkscreen, mask and mechanical layers (free items; w line width, h text height)
Bottom Overlay:
  text "PMID" at 30.5,33.5 h0.7
  text "PMID" at 35.9,23.7 h0.7
  text "VSYS" at 40.2,19.5 h0.7
  text "BAT" at 39.5,12.9 h0.7
  text "SDA" at 10.4,6.6 h0.7 r90
  text "INT" at 12.9,6.6 h0.7 r90
  text "GND" at 15.5,6.6 h0.7 r90
  text "TS" at 20.9,6.6 h0.7 r90
  text "SCL" at 7.7,6.4 h0.7 r90